# Altium PCB HSBNE-IO.PcbDoc (part 1 of 2)
Units mm, origin at the board's own origin, x right, y up, seen from the top; angles counter-clockwise.
Board outline 100.03 x 80.03 mm, 2 copper layers (Top Layer, Bottom Layer); 109 components, 155 nets, 584 pads, 281 vias.
Unrouted connection lines stored in the file: 2.
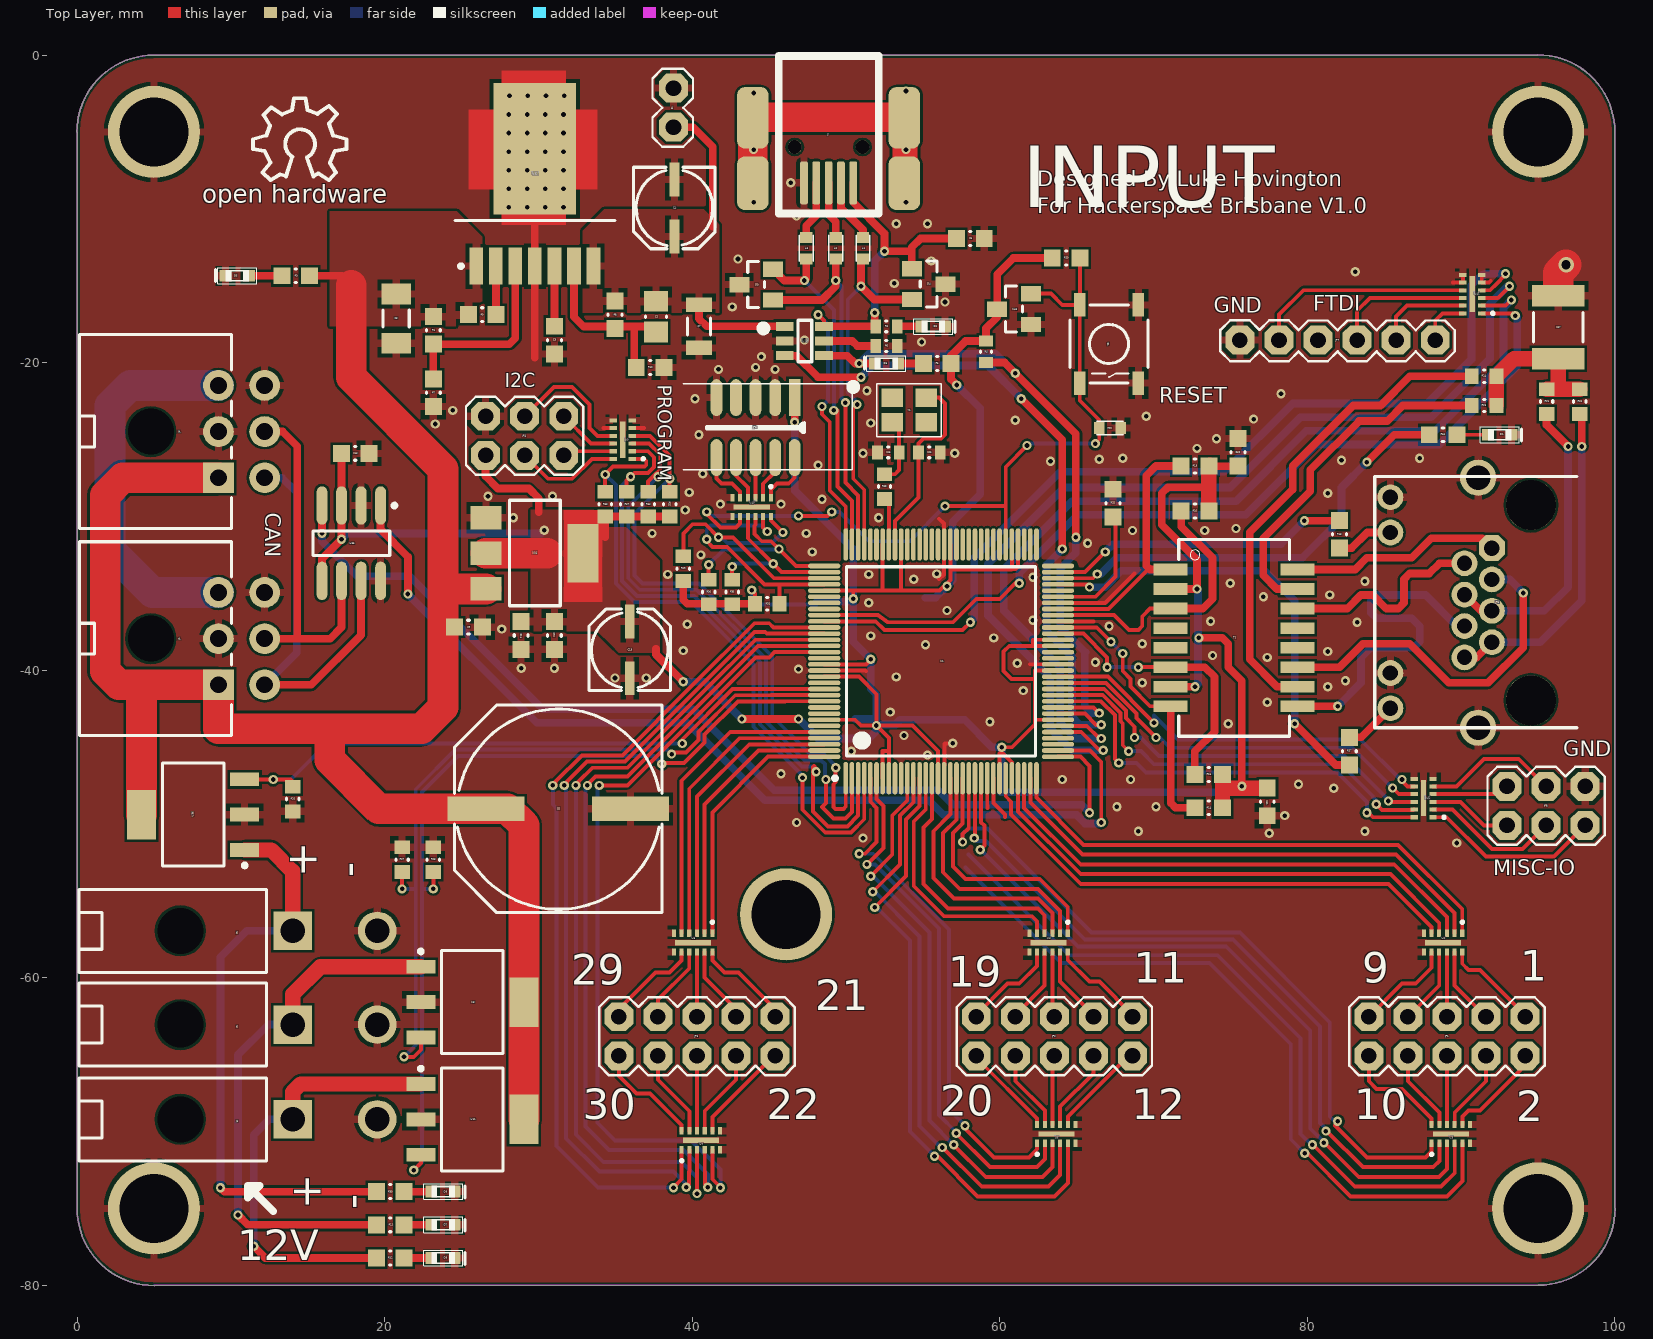
[diagram p0: Top Layer view]
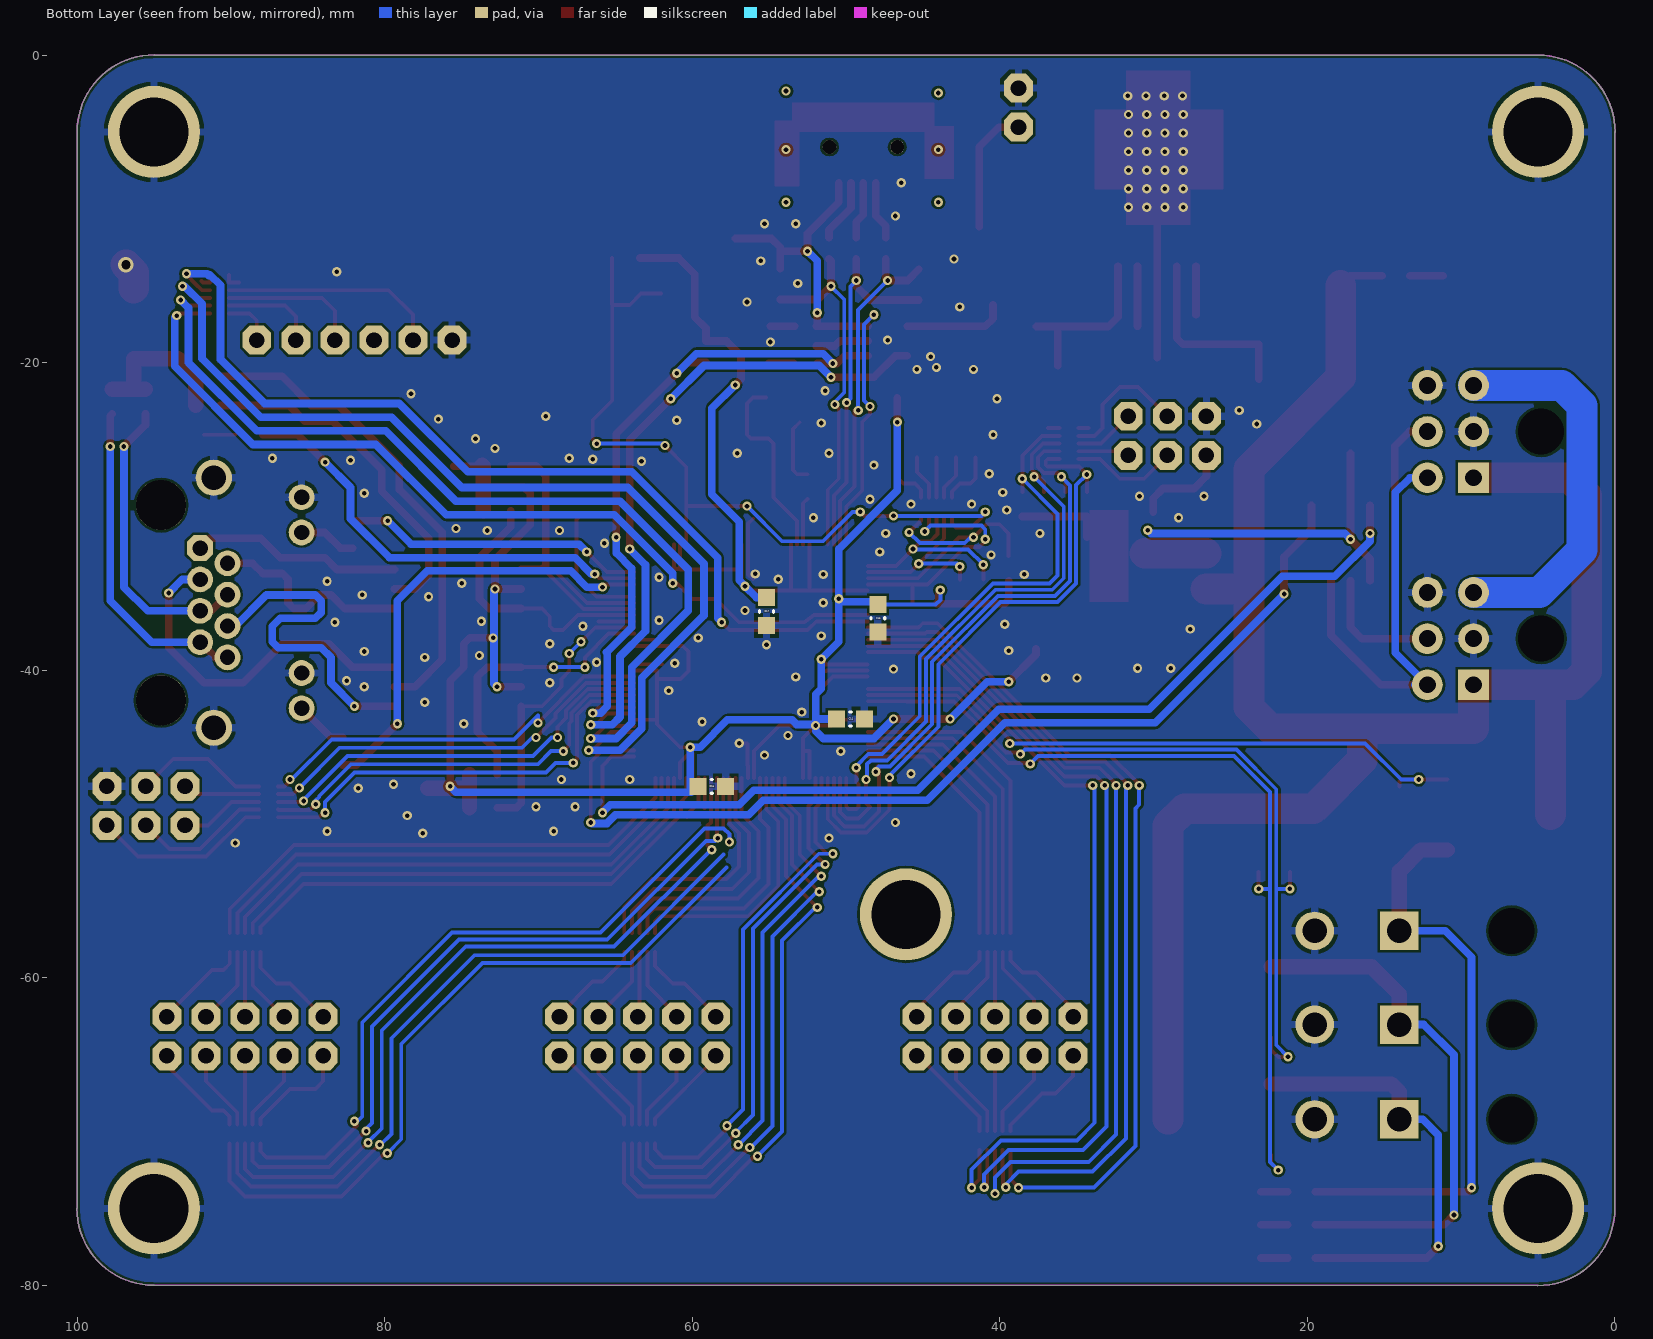
[diagram p1: Bottom Layer view, seen from below]

## Layer stack, top to bottom
Top Solder: solder mask 0.0102, Solder Resist, Dk 3.5
Top Layer: signal copper 0.0356
Dielectric 1: dielectric 0.32, FR-4, Dk 4.8
Bottom Layer: signal copper 0.0356
Bottom Solder: solder mask 0.0102, Solder Resist, Dk 3.5

## Board outline
5.004,-80.013 cw(c5.004,-75.013) 0.004,-75.013 0,-75 0,-5 -0.013,-5.004 cw(c4.987,-5.004) 4.987,-0.004 5,0 95,0 94.996,0.013 cw(c94.996,-4.987) 99.996,-4.987 100,-5 100,-75 100.013,-74.996 cw(c95.013,-74.996) 95.013,-79.996 95,-80

## Design rules (kind name [scope] priority, off if disabled: settings)
Clearance Micro [InComponent('U1') vs InNetClass('All Nets')] p1: gap=0.15 except(0.1: Track-Track Track-SMDPad Track-THPad SMDPad-SMDPad SMDPad-THPad THPad-THPad)
Clearance [All] p2: gap=0.15
DiffPairsRouting [All] p1: maxlimit=0.254 minlimit=0.254 mostfreqgap=0.254 toplayer_minwidth=0.254 toplayer_maxwidth=0.5 toplayer_prefwidth=0.381 bottomlayer_minwidth=0.254 bottomlayer_maxwidth=0.5 bottomlayer_prefwidth=0.381 maxuncoupledlength=12.7
HoleSize [All] p1: absolutevalues=TRUE maxlimit=4.5 minlimit=0.025 maxpercent=80.000 minpercent=20.000
MinimumSolderMaskSliver [All] p1: minsoldermaskwidth=0.2
PlaneClearance [All] p1: clearance=2
PlaneConnect [All] p1: planeconnectstyle=Relief reliefexpansion=0.508 reliefentries=4 reliefconductorwidth=0.5 reliefairgap=0.254
PolygonConnect via [All vs isvia] p1: connectstyle=Direct reliefconductorwidth=0.254 reliefentries=4 polygonreliefangle="90 Angle" airgapwidth=0.254
PolygonConnect [All] p2: connectstyle=Relief reliefconductorwidth=0.5 reliefentries=4 polygonreliefangle="90 Angle" airgapwidth=0.254
RoutingVias [All] p1: holewidth=0.5 width=1 viastyle="Through Hole" minholewidth=0.3 minwidth=0.6 maxholewidth=0.711 maxwidth=1.27
SilkToSolderMaskClearance [IsPad] p1: minsilkscreentomaskgap=0.127 clearancetoexposedcopper=TRUE
SolderMaskExpansion [All] p1: expansion=0.102
Width [All] p1: maxlimit=2 minlimit=0.254 preferedwidth=0.254
24 further rules are at their usual default settings.

## Classes and differential pairs
component class Power: C1 C3 C4 C6 C7 C8 C9 C10 C11 C13 C14 C15 C16 C17 D5 D7 D8 D9 J3 J4 J5 J6 R1 R3 R7 R8 R9 R10 R11 R12 R26 R27 R28 R30 U8 U11 U32 U34 U36
component class ButtonInputs: JP1 JP2 JP3 U2 U3 U4 U5 U6 U7
component class Micro: U1
component class Crystal: C20 C21 C24 C25 C26 C27 D1 JP5 R13 R14 R15 R16 R17 R18 R19 R20 R21 R22 R23 R24 R25 R34 S1 T1 U43 Y1
component class IO: C5 C12 D2 D3 D4 D6 J1 J2 J7 JP4 JP6 JP7 JP8 L1 L2 L3 R2 R4 R5 R6 R29 R31 R32 R33 R35 R36 R37 R38 U9 U10 U35 U40 U41 U42
differential pair RX: +RX_P -RX_N
differential pair EP_RX: +EP_RX_P -EP_RX_N
differential pair EP_TX: +EP_TX_P -EP_TX_N
differential pair TX: +TX_P -TX_N
differential pair USB: +USB_P -USB_N

## Components (designator, comment, footprint, x,y, rotation, side; value= is the part's Value field where it differs from the comment)
C1 "CAP 22nF 25V" CAPC0805(2012)100_M 37.643,-17.008 r90 top
C3 "CAP 4.7nF 50V" CAPC0603(1608)100_M 31.039,-18.532 r90 top
C4 "100uF" PANASONIC_C 39.04,-9.896 r270 top
C5 "CAP 100nF 50V" CAPC0603(1608)100_M 58.09,-11.928 r180 top
C6 "1000uF" PANASONIC_H13 31.293,-49.012 r180 top
C7 "CAP 47uF 25V" CAPC1206(3216)100_L 40.437,-17.643 r270 top
C8 "CAP 10uF 50V" CAPC1206(3216)190_M 20.752,-17.135 r270 top
C9 "CAP 1uF 25V" CAPC0603(1608)100_M 25.451,-37.201 r180 top
C10 "CAP 1uF 25V" CAPC0603(1608)100_M 31.035,-37.74 r90 top
C11 "CAP 1uF 25V" CAPC0603(1608)100_M 28.876,-37.74 r90 top
C12 "CAP 100nF 50V" CAPC0603(1608)100_M 18.085,-25.898 r180 top
C13 "100uF" PANASONIC_C 35.738,-38.725 r90 top
C14 "CAP 100nF 50V" CAPC0603(1608)100_M 49.708,-43.17 r0 bottom
C15 "CAP 100nF 50V" CAPC0603(1608)100_M 58.725,-47.549 r0 bottom
C16 "CAP 100nF 50V" CAPC0603(1608)100_M 47.93,-36.627 r90 bottom
C17 "CAP 100nF 50V" CAPC0603(1608)100_M 55.169,-36.185 r90 bottom
C20 "CAP 100nF 50V" CAPC0603(1608)100_M 75.489,-25.832 r270 top
C21 "CAP 100nF 50V" CAPC0603(1608)100_M 77.394,-48.565 r90 top
C24 "NP" 0603 67.869,-24.247 r180 top
C25 "CAP 12pF 16V" CAPC0603(1608)100_L 52.756,-25.832 r0 top
C26 "CAP 12pF 16V" CAPC0603(1608)100_L 55.423,-25.832 r180 top
C27 "CAP 1nF 2KV 1812(4532)" CAPC1812(4532)230_N 96.317,-17.704 r90 top
D1 "LED" LED-0603 92.507,-24.689 r0 top
D2 "LED" LED-0603 55.677,-17.643 r0 top
D3 "GSOT12C" "SOT-23 - ESD" 45.263,-15.926 r90 top
D4 "GSOT12C" "SOT-23 - ESD" 54.28,-13.894 r270 top
D5 "LED" LED-0603 10.414,-14.351 r180 top
D6 "LED" LED-0603 52.629,-20.056 r180 top
D7 "LED" LED-0603 23.8,-76.063 r0 top
D8 "LED" LED-0603 23.8,-78.222 r0 top
D9 "LED" LED-0603 23.8,-73.904 r0 top
J1 "M43045H-6" M43045H-6 9.195,-40.945 r270 top
J2 "M43045H-6" M43045H-6 9.195,-27.483 r270 top
J3 "AUX" M5569-2 14.021,-69.205 r270 top
J4 "1x2" 1X2 38.786,-4.689 r90 top
J5 "AUX" M5569-2 14.021,-56.947 r270 top
J6 "AUX" M5569-2 14.021,-63.043 r270 top
J7 "67503-1020" MOLX-67503-1020_V 50.47,-8.306 r270 top
JP1 "Header 5x2 2.54mm" 2X5 89.078,-63.805 r180 top
JP2 "Header 5x2 2.54mm" 2X5 63.551,-63.805 r180 top
JP3 "Header 5x2 2.54mm" 2X5 40.31,-63.805 r180 top
JP4 "Header 3x2 2.54mm" 2X3 29.134,-24.755 r0 top
JP5 "RJHSE-5384" RJHSE-5484 94.54,-35.613 r90 top
JP6 "Header 5x2 1.27mm" SOP10 46.66,-22.276 r270 top
JP7 "FTDI Header" 1X6 84.506,-19.802 r180 top
JP8 "Header 3x2 2.54mm" 2X3 95.555,-48.819 r0 top
L1 "MPZ1608S102A" 0603 51.105,-13.259 r90 top
L2 "MPZ1608S102A" 0603 49.327,-13.259 r90 top
L3 "MPZ1608S102A" 0603 47.422,-13.259 r90 top
R1 "34K 1%" RESC0603(1608)_M 23.165,-17.897 r90 top
R2 "180R 5%" RESC0603(1608)_L 52.629,-17.643 r180 top
R3 "560R 5%" RESC0603(1608)_M 14.224,-14.351 r0 top
R4 "16K 5%" RESC0603(1608)_L 59.106,-19.294 r90 top
R5 "68R 5%" RESC0603(1608)_M 55.931,-20.056 r0 top
R6 "16K 5%" RESC0603(1608)_L 52.629,-18.913 r180 top
R7 "2K43 5%" RESC0603(1608)_M 23.165,-21.961 r90 top
R8 "34K 1%" RESC0603(1608)_M 34.976,-16.881 r90 top
R9 "249K 1%" RESC0603(1608)_M 26.34,-16.881 r0 top
R10 "2K43 5%" RESC0603(1608)_M 37.262,-20.31 r180 top
R11 "560R 5%" RESC0603(1608)_M 20.371,-76.063 r180 top
R12 "560R 5%" RESC0603(1608)_M 20.371,-78.222 r180 top
R13 "49.9R 5%" RESC0603(1608)_M 72.695,-26.721 r0 top
R14 "49.9R 5%" RESC0603(1608)_M 73.584,-48.946 r0 top
R15 "49.9R 5%" RESC0603(1608)_M 73.584,-46.787 r0 top
R16 "49.9R 5%" RESC0603(1608)_M 72.695,-29.642 r0 top
R17 "220R 5%" RESC0603(1608)_M 82.728,-45.263 r270 top
R18 "220R 5%" RESC0603(1608)_M 82.093,-31.166 r90 top
R19 "2K43 5%" RESC0603(1608)_M 64.313,-13.198 r180 top
R20 "2K 5%" RESC0603(1608)_N 52.502,-28.057 r90 top
R21 "75R 5%" RESC0603(1608)_N 95.555,-22.53 r90 top
R22 "75R 5%" RESC0603(1608)_N 97.714,-22.53 r90 top
R23 "75R 5%" RESC0603(1608)_N 91.491,-22.784 r0 top
R24 "75R 5%" RESC0603(1608)_N 91.491,-20.879 r0 top
R25 "4K87 5%" RESC0603(1608)_M 67.361,-29.134 r270 top
R26 "10K 5%" RESC0603(1608)_N 14.021,-48.377 r90 top
R27 "10K 5%" RESC0603(1608)_N 21.133,-52.314 r270 top
R28 "10K 5%" RESC0603(1608)_N 23.165,-52.314 r270 top
R29 "10K 5%" RESC0603(1608)_N 39.421,-33.391 r270 top
R30 "560R 5%" RESC0603(1608)_M 20.371,-73.904 r180 top
R31 "10K 5%" RESC0603(1608)_N 44.882,-35.677 r180 top
R32 "10K 5%" RESC0603(1608)_N 38.532,-29.2 r270 top
R33 "10K 5%" RESC0603(1608)_N 37.135,-29.2 r270 top
R34 "220R 5%" RESC0603(1608)_M 88.824,-24.689 r180 top
R35 "10K 5%" RESC0603(1608)_N 42.596,-34.915 r90 top
R36 "10K 5%" RESC0603(1608)_N 41.072,-34.915 r90 top
R37 "10K 5%" RESC0603(1608)_N 35.738,-29.2 r270 top
R38 "10K 5%" RESC0603(1608)_N 34.341,-29.2 r270 top
S1 "EVQ-Q2B03W" TACTILE_SWITCH_SMD 67.107,-18.786 r270 top
T1 "H2019FNLT" HXXXX 75.235,-37.897 r270 top
U1 "TM4C1294NCPDTI3R" TI-PDT128_M 56.185,-39.421 r90 top
U2 "NUF6401MNT1G" ONSC-DFN-12-506AD-01_V#1 88.824,-57.709 r270 top
U3 "NUF6401MNT1G" ONSC-DFN-12-506AD-01_V#1 89.332,-70.155 r90 top
U4 "NUF6401MNT1G" ONSC-DFN-12-506AD-01_V#1 63.17,-57.709 r270 top
U5 "NUF6401MNT1G" ONSC-DFN-12-506AD-01_V#1 63.678,-70.155 r90 top
U6 "NUF6401MNT1G" ONSC-DFN-12-506AD-01_V#1 40.056,-57.709 r270 top
U7 "NUF6401MNT1G" ONSC-DFN-12-506AD-01_V#1 40.564,-70.569 r90 top
U8 "ITS4200S-ME-O" INF-SOT223_M 25.705,-61.585 r0 top
U9 "NUF6401MNT1G" ONSC-DFN-12-506AD-01_V#2 35.484,-25.009 r180 top
U10 "BD2242G" SOT23-6 46.025,-17.643 r270 top
U11 "ITS4200S-ME-O" INF-SOT223_M 25.705,-69.205 r0 top
U32 "LMZ14203HTZ/NOPB" TZA07A_V 29.769,-8.372 r90 top
U34 "3V3LinReg" SOT-223 26.594,-30.089 r270 top
U35 "SN65HVD234D" D8_M 17.831,-31.74 r270 top
U36 "ITS4200S-ME-O" INF-SOT223_M 7.544,-49.393 r180 top
U40 "NUF6401MNT1G" ONSC-DFN-12-506AD-01_V#1 43.866,-29.388 r270 top
U41 "NUF6401MNT1G" ONSC-DFN-12-506AD-01_V#1 90.729,-15.545 r180 top
U42 "NUF6401MNT1G" ONSC-DFN-12-506AD-01_V#1 87.554,-48.311 r180 top
U43 "APX803" "SOT-23 - ESD" 62.027,-17.516 r90 top
Y1 "25MHz" "CRYSTAL 3.2X2.5" 51.994,-24.816 r0 top

## Footprints (in the part's own frame and the unit in brackets; to place one, negate y for a bottom-side part, rotate by r counter-clockwise, add the part's x,y. Pads: shape width x height; smd on the part's side, far side on the other; paste and mask are expansions set on the pad)
1X2 [mil]
  oct 74x74 hole 40: 1(0,0) 2(100,0)
  silkscreen extent -50,-50 150,54
1X6 [mil]
  oct 74x74 hole 40: 1(-150,-50) 2(-50,-50) 3(50,-50) 4(150,-50) 5(250,-50) 6(350,-50)
  silkscreen extent -200,-101 400,4, body extent -200,-100 400,0, height 298
2X3 [mil]
  oct 74x74 hole 40: 1(-101.18,-50) 2(-101.18,50) 3(-1.18,-50) 4(-1.18,50) 5(98.82,-50) 6(98.82,50)
  silkscreen extent -151,-100 149,100, body extent -150,-100 150,100, height 330
2X5 [mil]
  oct 74x74 hole 40: 1(-200,-50) 2(-200,50) 3(-100,-50) 4(-100,50) 5(0,-50) 6(0,50) 7(100,-50) 8(100,50) 9(200,-50) 10(200,50)
  silkscreen extent -250,-100 250,100, body extent -242,-95 242,95, height 397
0603 [mm]
  rect 0.7x0.8 smd paste+0 mask+0.1: 1(0,0) 2(1.4,0)
  silkscreen extent -0.15,-0.45 1.55,0.45, body extent -0.15,-0.45 1.55,0.45, height 0.53
CAPC0603(1608)100_L [mm] "Chip Capacitor, Body 1.6x0.8mm, Height 1.0mm, IPC High Density"
  rect 0.7x0.9 smd: 1(-0.7,0) 2(0.7,0)
  silkscreen extent -0.05,-0.35 0.05,0.35, body extent -0.87,-0.47 0.88,0.48, height 1
CAPC0603(1608)100_M [mm] "Chip Capacitor, Body 1.6x0.8mm, Height 1.0mm, IPC Low Density"
  rect 1.1x1.1 smd: 1(-0.9,0) 2(0.9,0)
  silkscreen extent -0.05,-0.45 0.05,0.45, body extent -0.87,-0.47 0.88,0.48, height 1
CAPC0805(2012)100_M [mm] "Chip Capacitor, Body 2.0x1.2mm, Height 1.0mm, IPC Low Density"
  rect 1.35x1.55 smd: 1(-1,0) 2(1,0)
  silkscreen extent -0.05,-0.67 0.05,0.67, body extent -1.1,-0.72 1.1,0.72, height 1
CAPC1206(3216)100_L [mm] "Chip Capacitor, Body 3.2x1.6mm, Height 1mm, IPC High Density"
  rect 0.95x1.7 smd: 1(-1.4,0) 2(1.4,0)
  silkscreen extent -0.55,-0.75 0.55,0.75, body extent -1.7,-0.9 1.7,0.9, height 1
CAPC1206(3216)190_M [mm] "Chip Capacitor, Body 3.2x1.6mm, Height 1.9mm, IPC Low Density"
  rect 1.35x1.9 smd: 1(-1.6,0) 2(1.6,0)
  silkscreen extent -0.55,-0.85 0.55,0.85, body extent -1.7,-0.9 1.7,0.9, height 1.9
CAPC1812(4532)230_N [mm] "Chip Capacitor, Body 4.5x3.2mm, Height 2.3mm, IPC Medium Density"
  rect 1.4x3.4 smd: 1(-2.05,0) 2(2.05,0)
  silkscreen extent -0.95,-1.6 0.95,1.6, body extent -2.4,-1.7 2.4,1.7, height 2.3
"CRYSTAL 3.2X2.5" [mm]
  rect 1.4x1.2 smd: 1(1.016,0.94) 2(3.216,0.94) 3(3.216,2.54) 4(1.016,2.54)
  silkscreen extent 0,0 4.19,3.43, body extent 0.77,0.78 3.29,2.78, height 0.56
D8_M [mm] "SOIC, 8-Leads, Body 4.9x3.9mm, Pitch 1.27mm, IPC Low Density"
  oval 2.5x0.7 smd: 1(-2.45,1.905) 2(-2.45,0.635) 3(-2.45,-0.635) 4(-2.45,-1.905) 5(2.45,-1.905) 6(2.45,-0.635) 7(2.45,0.635) 8(2.45,1.905)
  silkscreen extent -2.57,-2.5 0.8,2.93, body extent -2,-2.5 2,2.5, height 1.75
HXXXX [mm]
  rect 0.76x2.2 smd: 1(-4.445,-4.128) 2(-3.175,-4.128) 3(-1.905,-4.128) 4(-0.635,-4.128) 5(0.635,-4.128) 6(1.905,-4.128) 7(3.175,-4.128) 8(4.445,-4.128) 9(4.445,4.128) 10(3.175,4.128) 11(1.905,4.127) 12(0.635,4.127) 13(-0.635,4.127) 14(-1.905,4.127) 15(-3.175,4.127) 16(-4.445,4.127)
  silkscreen extent -6.4,-3.6 6.4,3.6, body extent -6.38,-4.28 6.38,4.13, height 6
INF-SOT223_M [mm] "SOT223, 4-Leads, Body 6.5x3.5mm, Pitch 2.3mm, IPC Low Density"
  rect 1.9x0.9 smd: 1(-3.35,2.3) 2(-3.35,0) 3(-3.35,-2.3)
  rect 1.9x3.2 smd: 4(3.35,0)
  silkscreen extent -3.47,-3.35 2,3.42, body extent -1.85,-3.35 1.85,3.35, height 1.7
LED-0603 [mil]
  rect 30x30 smd: 1(-30,0) 2(30,0)
  Top Overlay keep-out lines w2: -50,-20 50,-20 50,20 -50,20 -50,-20
  silkscreen extent -50,-20 56,20, body extent -33,-14 32,14, height 27
M5569-2 [mm]
  rect 2.5x2.5 hole 1.6: 1(0,0)
  round 2.5 hole 1.6: 2(0,5.5)
  round 0 hole 3 unplated: A(0,-7.3)
  silkscreen extent -2.7,-13.9 2.7,-1.7, body extent -2.72,-13.91 3.08,6.03, height 11.4
M43045H-6 [mm]
  rect 2x2 hole 1.1: 1(0,0)
  round 2 hole 1.1: 2(-3,0) 3(-6,0) 4(0,3) 5(-3,3) 6(-6,3)
  round 0 hole 3 unplated: 7(-3,-4.4)
  silkscreen extent -9.3,-9.05 3.3,0.85, body extent -9.57,-8.95 3.58,3.25, height 8.83
MOLX-67503-1020_V [mm] "Mini USB Connector, SMT, Righer Angle"
  rrect50% 2.8x0.5 smd: 1(0,0) 2(0,-0.8) 3(0,-1.6) 4(0,-2.4) 5(0,-3.2)
  rrect50% 3.5x2.05 smd: 6(0.025,3.325) 8(0.025,-6.525)
  rrect50% 4x2.05 smd: 7(-4.225,3.325) 9(-4.225,-6.525)
  round 0.9 hole 0.9 unplated: X(-2.325,-3.8) Y(-2.325,0.6)
  silkscreen extent -8.25,-4.85 2,1.65, body extent -8.22,-6.56 0.78,3.34, height 3.95
ONSC-DFN-12-506AD-01_V#1 [mm] "SON, 12-Leads, Body 3x1.35mm, Pitch 0.5mm, Thermal Pad 2.352x0.351mm"
  rect 0.479x0.265 smd mask+0.05: 1(-0.614,1.25) 2(-0.614,0.75) 3(-0.614,0.25) 4(-0.614,-0.25) 5(-0.614,-0.75) 6(-0.614,-1.25) 7(0.614,-1.25) 8(0.614,-0.75) 9(0.614,-0.25) 10(0.614,0.25) 11(0.614,0.75) 12(0.614,1.25)
  rect 0.351x2.352 smd mask+0.05: 13(0,0)
  silkscreen extent -1.38,1.2 -1.28,1.3, body extent -0.67,-1.5 0.67,1.5, height 1
ONSC-DFN-12-506AD-01_V#2 [mm] "SON, 12-Leads, Body 3x1.35mm, Pitch 0.5mm, Thermal Pad 2.352x0.351mm"
  rect 0.479x0.265 smd: 1(-0.614,1.25) 2(-0.614,0.75) 3(-0.614,0.25) 4(-0.614,-0.25) 5(-0.614,-0.75) 6(-0.614,-1.25) 7(0.614,-1.25) 8(0.614,-0.75) 9(0.614,-0.25) 10(0.614,0.25) 11(0.614,0.75) 12(0.614,1.25)
  rect 0.351x2.352 smd: 13(0,0)
  silkscreen extent -1.38,1.2 -1.28,1.3, body extent -0.67,-1.5 0.67,1.5, height 1
PANASONIC_C [mm]
  rect 2.2x0.65 smd: +(1.9,-0.2) -(-1.8,-0.2)
  silkscreen extent -2.6,-2.85 2.7,2.45, body extent -2.63,-2.88 2.75,2.5, height 5.4
PANASONIC_H13 [mm]
  rect 5x1.6 smd: +(4.7,0) -(-4.7,0)
  silkscreen extent -6.75,-6.75 6.75,6.75, body extent -6.75,-6.75 6.75,6.75, height 13.5
RESC0603(1608)_L [mm] "Chip Resistor, Body 1.6x0.8mm, IPC High Density"
  rect 0.7x0.9 smd: 1(-0.7,0) 2(0.7,0)
  silkscreen extent -0.05,-0.35 0.05,0.35, body extent -0.85,-0.47 0.85,0.47, height 0.6
RESC0603(1608)_M [mm] "Chip Resistor, Body 1.6x0.8mm, IPC Low Density"
  rect 1.1x1.1 smd: 1(-0.9,0) 2(0.9,0)
  silkscreen extent -0.05,-0.45 0.05,0.45, body extent -0.85,-0.47 0.85,0.47, height 0.6
RESC0603(1608)_N [mm] "Chip Resistor, Body 1.6x0.8mm, IPC Medium Density"
  rect 0.9x1 smd: 1(-0.8,0) 2(0.8,0)
  silkscreen extent -0.05,-0.4 0.05,0.4, body extent -0.85,-0.47 0.85,0.47, height 0.6
RJHSE-5484 [mm]
  oct 1.676x1.676 hole 1: 1(3.555,2.54)
  round 1.676 hole 1: 2(2.565,4.32) 3(1.515,2.54) 4(0.525,4.32) 5(-0.525,2.54) 6(-1.515,4.32) 7(-2.565,2.54) 8(-3.555,4.32) 9(-6.86,9.14) 10(-4.57,9.14) 11(4.57,9.14) 12(6.86,9.14)
  round 2.355 hole 1.57: GND1(-8.13,3.43) GND2(8.13,3.43)
  round 3.25 hole 3.25 unplated: ""(-6.35,0) ""(6.35,0)
  silkscreen extent -8.13,-3 8.2,10.16, body extent -8.35,-5.96 8.36,10.29, height 14.75
SOP10 [mm]
  rect 2.4x0.76 smd: 1(0,0)
  oval 2.4x0.76 smd: 2(3.9,0) 3(0,-1.27) 4(3.9,-1.27) 5(0,-2.54) 6(3.9,-2.54) 7(0,-3.81) 8(3.9,-3.81) 9(0,-5.08) 10(3.9,-5.08)
  silkscreen extent -0.89,-7.24 4.7,3.76, body extent -1.14,-7.24 4.83,2.29, height 5.59
SOT23-6 [mm]
  rect 0.6x1.15 smd: 1(0,0) 2(0.95,0) 3(1.9,0) 4(1.9,2.55) 5(0.95,2.54) 6(0,2.55)
  silkscreen extent -0.4,0.85 2.3,1.75, body extent -0.51,0.63 2.41,2.03, height 0.5
"SOT-23 - ESD" [mm]
  rect 1x1.3 smd: 1(0,0) 2(2,0) 3(1,2.2)
  silkscreen extent -0.5,0.55 2.5,1.65, body extent -0.64,0.51 2.54,1.78, height 1
SOT-223 [mil]
  rect 60x80 smd: 1(0,0) 2(91,0) 3(182,0)
  rect 150x80 smd: 4(91,248)
  silkscreen extent -45,60 225,190, body extent -38,-7 218,267, height 63
TACTILE_SWITCH_SMD [mil]
  rect 60x30 smd: 1(-100,75) 2(100,75) 3(-100,-75) 4(100,-75)
  silkscreen extent -100,-100 100,100, body extent -103,-108 103,103, height 122
TI-PDT128_M [mm] "Thin QFP, 128-Leads, Body 14x14mm, Pitch 0.4mm, IPC Low Density"
  oval 2.1x0.3 smd: 1(-7.6,6.2) 2(-7.6,5.8) 3(-7.6,5.4) 4(-7.6,5) 5(-7.6,4.6) 6(-7.6,4.2) 7(-7.6,3.8) 8(-7.6,3.4) 9(-7.6,3) 10(-7.6,2.6) 11(-7.6,2.2) 12(-7.6,1.8) 13(-7.6,1.4) 14(-7.6,1) 15(-7.6,0.6) 16(-7.6,0.2) 17(-7.6,-0.2) 18(-7.6,-0.6) 19(-7.6,-1) 20(-7.6,-1.4) 21(-7.6,-1.8) 22(-7.6,-2.2) 23(-7.6,-2.6) 24(-7.6,-3) 25(-7.6,-3.4) 26(-7.6,-3.8) 27(-7.6,-4.2) 28(-7.6,-4.6) 29(-7.6,-5) 30(-7.6,-5.4) 31(-7.6,-5.8) 32(-7.6,-6.2) 65(7.6,-6.2) 66(7.6,-5.8) 67(7.6,-5.4) 68(7.6,-5) 69(7.6,-4.6) 70(7.6,-4.2) 71(7.6,-3.8) 72(7.6,-3.4) 73(7.6,-3) 74(7.6,-2.6) 75(7.6,-2.2) 76(7.6,-1.8) 77(7.6,-1.4) 78(7.6,-1) 79(7.6,-0.6) 80(7.6,-0.2) 81(7.6,0.2) 82(7.6,0.6) 83(7.6,1) 84(7.6,1.4) 85(7.6,1.8) 86(7.6,2.2) 87(7.6,2.6) 88(7.6,3) 89(7.6,3.4) 90(7.6,3.8) 91(7.6,4.2) 92(7.6,4.6) 93(7.6,5) 94(7.6,5.4) 95(7.6,5.8) 96(7.6,6.2)
  oval 0.3x2.1 smd: 33(-6.2,-7.6) 34(-5.8,-7.6) 35(-5.4,-7.6) 36(-5,-7.6) 37(-4.6,-7.6) 38(-4.2,-7.6) 39(-3.8,-7.6) 40(-3.4,-7.6) 41(-3,-7.6) 42(-2.6,-7.6) 43(-2.2,-7.6) 44(-1.8,-7.6) 45(-1.4,-7.6) 46(-1,-7.6) 47(-0.6,-7.6) 48(-0.2,-7.6) 49(0.2,-7.6) 50(0.6,-7.6) 51(1,-7.6) 52(1.4,-7.6) 53(1.8,-7.6) 54(2.2,-7.6) 55(2.6,-7.6) 56(3,-7.6) 57(3.4,-7.6) 58(3.8,-7.6) 59(4.2,-7.6) 60(4.6,-7.6) 61(5,-7.6) 62(5.4,-7.6) 63(5.8,-7.6) 64(6.2,-7.6) 97(6.2,7.6) 98(5.8,7.6) 99(5.4,7.6) 100(5,7.6) 101(4.6,7.6) 102(4.2,7.6) 103(3.8,7.6) 104(3.4,7.6) 105(3,7.6) 106(2.6,7.6) 107(2.2,7.6) 108(1.8,7.6) 109(1.4,7.6) 110(1,7.6) 111(0.6,7.6) 112(0.2,7.6) 113(-0.2,7.6) 114(-0.6,7.6) 115(-1,7.6) 116(-1.4,7.6) 117(-1.8,7.6) 118(-2.2,7.6) 119(-2.6,7.6) 120(-3,7.6) 121(-3.4,7.6) 122(-3.8,7.6) 123(-4.2,7.6) 124(-4.6,7.6) 125(-5,7.6) 126(-5.4,7.6) 127(-5.8,7.6) 128(-6.2,7.6)
  silkscreen extent -7.72,-6.15 6.15,7.02, body extent -7,-7 7,7, height 1.2
TZA07A_V [mm] "D2-PAK, 8-Leads, Body 9.9x10.2mm, Pitch 1.27mm, Lead Span 13.8mm, NSC Recommended"
  rect 2.41x0.89 smd: 1(-5.35,3.81) 2(-5.35,2.54) 3(-5.35,1.27) 4(-5.35,0) 5(-5.35,-1.27) 6(-5.35,-2.54) 7(-5.35,-3.81)
  rect 8.54x5.35 smd: 8(2.28,0)
  silkscreen extent -5.47,-5.2 -2.39,5.2, body extent -2.3,-5.2 7.8,5.2, height 4.67

## Part data
C1: library part CMP-1036-04051-1, "CAP 22nF 25V ±5% 0805 (2012 Metric) Thickness 1mm SMD"
C3: library part CMP-1035-00333-1, "CAP 4.7nF 50V ±20% 0603 (1608 Metric) Thickness 1mm SMD"
C4 C13: library part Cap_Polarized_100uF, "Polarized Capacitor (Surface Mount)"
C5 C12 C14 C15 C16 C17 C20 C21: library part CMP-1035-00010-1, "CAP 100nF 50V ±0.1pF 0603 (1608 Metric) Thickness 1mm SMD"
C6: library part Cap_Polarized_1000uF, "Polarized Capacitor (Surface Mount)"
C7: library part CMP-1037-00376-1, "CAP 47uF 25V ±0.25pF 1206 (3216 Metric) Thickness 1mm SMD"
C8: library part CMP-1037-04982-1, "CAP 10uF 50V ±10% 1206 (3216 Metric) Thickness 1.9mm SMD"
C9 C10 C11: library part CMP-1035-00037-1, "CAP 1uF 25V ±0.25pF 0603 (1608 Metric) Thickness 1mm SMD"
C24: library part Cap_100pF, "Capacitor (Semiconductor SIM Model)"
C25 C26: library part CMP-1035-00602-1, "CAP 12pF 16V ±0.25pF 0603 (1608 Metric) Thickness 1mm SMD"
C27: library part CMP-1040-00330-1, "CAP 1nF 2KV ±10% 1812 (4532 Metric) Thickness 2.3mm SMD"
D1 D2 D5 D6 D7 D8 D9: "Typical RED, GREEN, YELLOW, AMBER GaAs LED"
D3 D4: library part 2749, "DIO GSOT12C ESD 2LINE 12V SOT23"
J1 J2: library part CON6
J3 J4 J5 J6: library part CON2, "6.35mm right-angle 90° male spade terminal PCB mount"
J7: library part CMP-0411-00002-1, "USB, MINI, SMD, RA KME04-USBMU03A01"
JP1 JP2 JP3: library part "Header 5x2", "Header, 8-Pin"
JP4 JP8: library part "Header 3x2", "Header, 6-Pin"
JP5: library part "Ethernet Socket", "Ethernet Socket RJ45 With Leds"
JP6: library part "Header 5x2", "Program"
JP7: library part "Header 6", "Header, 6-Pin"
L1 L2 L3: library part 2982, "IND FERRITE CHIP BEAD 1000 OHM @ 100MHz 800mA 0603"
R1 R8: library part CMP-1012-00682-1, "34K 0.1W 1% 0603 (1608 Metric)  SMD"
R2: library part CMP-1012-00056-1, "180R 0.1W 5% 0603 (1608 Metric)  SMD"
R3 R11 R12 R30: library part CMP-1012-00068-1, "560R 0.1W 5% 0603 (1608 Metric)  SMD"
R4 R6: library part CMP-1012-00103-1, "16K 0.1W 5% 0603 (1608 Metric)  SMD"
R5: library part CMP-1012-00046-1, "68R 0.1W 5% 0603 (1608 Metric)  SMD"
R7 R10 R19: library part CMP-1012-00083-1, "2K43 0.1W 5% 0603 (1608 Metric)  SMD"
R9: library part CMP-1012-00779-1, "249K 0.1W 1% 0603 (1608 Metric)  SMD"
R13 R14 R15 R16: library part CMP-1012-00042-1, "49.9R 0.1W 5% 0603 (1608 Metric)  SMD"
R17 R18 R34: library part CMP-1012-00058-1, "220R 0.1W 5% 0603 (1608 Metric)  SMD"
R20: library part CMP-1012-00081-1, "2K 0.1W 5% 0603 (1608 Metric)  SMD"
R21 R22 R23 R24: library part CMP-1012-00047-1, "75R 0.1W 5% 0603 (1608 Metric)  SMD"
R25: library part CMP-1012-00090-1, "4K87 0.1W 5% 0603 (1608 Metric)  SMD"
R26 R27 R28 R29 R31 R32 R33 R35 R36 R37 R38: library part CMP-1012-00098-1, "10K 0.1W 5% 0603 (1608 Metric)  SMD"
S1: library part SW-PB, "Switch"
T1: library part Magnetics, "Power over Ethernet Magnetic Module"
U1: library part CMP-0945-00007-1, "Tiva C Series Microcontroller, 1024 KB Flash, 256 KB SRAM, 12 Bit, 20 Channels, -40 to 85 degC, 128-Pin TQFP (PDT), Green (RoHS & no Sb/Br), Tape and Reel"
U2 U3 U4 U5 U6 U7 U9 U40 U41 U42: library part CMP-1066-00005-1, "6-Channel EMI Filter with Integrated ESD Protection, -40 to 105 degC, 12-Pin DFN, Pb-Free, Tape and Reel"
U8 U11 U36: library part CMP-1095-00143-1, "Smart High-Side NMOS-Power Switch, 11 to 45 V Operating, -40 to 125 degC, SOT223, Reel, Green"
U10: library part RT9728A, "BD2242G-GTR"
U32: library part CMP-0069-02044-1, "3A SIMPLE SWITCHER® Power Module with 42V Maximum Input for High Voltage Output, 7-pin TO-PMOD, Pb-Free, 250 Reel"
U34: library part AZ1117EH, "Reg 1A 3V3 OUT SIP VERT"
U35: library part CMP-0315-00083-1, "3.3V CAN Transceiver with Sleep Mode, 6 mA, -40 to 125 degC, 8-pin SOIC (D), Green (RoHS & no Sb/Br)"
U43: "IC MPU RESET CIRC 3.08V SOT23R-3"
Y1: library part Crystal_25MHz, "Surface Mount Quartz Crystal"

## Free pads (board coordinates)
  round 6 hole 4.5: 0(5,-75) 1(95,-75) 2(95,-5) 3(5,-5)
  round 6 hole 4.5 unplated paste+0 mask+1: 5(46.101,-55.88)

## Via types
v1: diameter 0.6, hole 0.3, Top Layer to Bottom Layer, tented both sides, 252 vias
v2: diameter 0.6, hole 0.3, Top Layer to Bottom Layer, tented bottom, 28 vias
v3: diameter 1, hole 0.6, Top Layer to Bottom Layer, tented both sides, 1 vias

## Nets (pads, with @x,y where several pads share a name; then routed paths per layer and width w, separated by ;. In a path a pad name is that pad's centre, name@x,y a point inside that pad or via, vN(x,y) a via of type N, cw(c..) or ccw(c..) an arc to the next point about the centre after c; other vN are vias at no path point)
3V3: C10.2 C11.2 C12.2 C13.+ C14.2 C15.2 C16.2 C17.2 C20.2 C21.2 JP4.1 JP6.1 R4.2 R5.2 R13.2 R14.2 R15.2 R16.2 R19.2 R29.2 R31.2 R32.2 R33.2 R35.1 R36.1 R37.2 R38.2 T1.2 T1.7 U1.7 U1.8 U1.16 U1.26 U1.28 U1.39 U1.47 U1.51 U1.52 U1.68 U1.69 U1.79 U1.87 U1.90 U1.101 U1.113 U1.115 U1.122 U34.2 U34.4 U35.3 U35.5 U43.3 | length 267.6
  Top Layer w0.254: v1(43.866,-34.788) 44.082,-35.004 R31.2@44.082,-35.677 ; U1.122@48.585,-43.221 50.597,-43.221 50.969,-43.593 v1(51.975,-43.593) ; U1.115@48.585,-40.421 50.835,-40.421 51.975,-41.561 v1(51.975,-43.593) ; U1.113@48.585,-39.621 50.724,-39.621 ; U1.101@48.585,-34.821 50.47,-34.821 ; v1(50.47,-35.357) 50.47,-34.821 ; 50.724,-39.617 51.29,-39.617 v1(51.613,-39.294) ; U1.7@52.385,-47.021 52.385,-45.263 52.785,-45.263 ; 52.385,-34.811 U1.90@52.385,-31.821 ; U1.8@52.785,-47.021 52.785,-45.263 ; U1.87@53.585,-31.821 53.585,-34.761 53.645,-34.821 ; U1.16@55.985,-47.021 55.985,-45.263 54.315,-43.593 v1(51.975,-43.593) ; U1.79@56.785,-31.821 56.785,-33.452 ; U1.26@59.985,-47.021 59.985,-45.4 v1@60.122,-45.263 ; 60.757,-33.452 56.785,-33.452 ; U1.28@60.785,-47.021 60.785,-45.988 60.122,-45.325 v1@60.122,-45.263 ; U1.69@60.785,-31.821 60.785,-33.424 61.039,-33.424 61.185,-33.278 U1.68@61.185,-31.821 ; 62.281,-40.564 60.757,-40.564 60.249,-40.056 60.249,-38.786 60.614,-38.421 62.154,-38.421 ; U1.39@63.785,-43.221 62.281,-43.221 ; U1.47@63.785,-40.021 62.281,-40.021 62.281,-43.221 ; U1.51@63.785,-38.421 62.154,-38.421 ; U1.52@63.785,-38.021 62.154,-38.021 62.154,-38.421 ; 50.47,-34.821 53.645,-34.821 ; v1(51.975,-43.593) 52.785,-44.403 52.785,-45.263 ; 53.645,-34.821 56.086,-34.821 56.785,-34.122 56.785,-33.452 ; v1@60.122,-45.263 v1(60.122,-45.009) 60.785,-45.009 62.281,-43.513 62.281,-43.221
  Top Layer w0.5: U35.5@15.926,-34.19 15.926,-32.756 v1(17.196,-31.486) U35.3@17.196,-29.29 C12.2@17.196,-25.909 ; JP4.1@26.564,-26.025 26.564,-27.392 27.356,-28.184 29.388,-28.184 30.023,-28.819 30.023,-29.708 ; U34.4@32.893,-32.4 U34.4@33.579,-31.715 ; 34.341,-31.359 R38.2@34.341,-30 R37.2@35.738,-30 R33.2@37.135,-30 R32.2@38.532,-30 ; 37.643,-38.598 37.643,-38.979 v1(39.421,-40.757) ; R29.2@39.421,-34.191 39.421,-35.423 39.675,-35.677 R31.2@44.082,-35.677 ; v1(43.231,-43.17) v1(46.914,-43.17) ; v1(46.66,-23.866) JP6.1@46.66,-22.276 ; v1(57.201,-21.453) 56.831,-21.083 R5.2@56.831,-20.056 56.831,-19.537 57.774,-18.594 R4.2@59.106,-18.594 59.106,-17.77 59.827,-17.049 U43.3@59.827,-16.516 59.827,-14.255 60.884,-13.198 R19.2@63.413,-13.198 ; T1.7@71.107,-41.072 v1(72.695,-41.072) ; T1.2@71.107,-34.722 v1(72.822,-34.722) 72.822,-32.817 70.536,-30.531 70.536,-28.499 70.94,-28.095 73.595,-28.095 ; v1(72.949,-37.897) 74.473,-37.897 74.854,-38.278 74.854,-39.802 75.743,-40.691 v1(75.743,-47.549) ; R13.2@73.66,-26.67 73.722,-26.732 C20.2@75.489,-26.732
  Top Layer w1: R16.2@73.595,-29.642 73.595,-28.095 73.595,-26.735 R13.2@73.66,-26.67 ; R14.2@74.484,-48.946 74.484,-47.919 ; R15.2@74.484,-46.787 74.484,-47.919 ; C21.2@77.191,-47.676 74.727,-47.676 74.484,-47.919
  Top Layer w2: U34.2@26.594,-32.4 30.556,-32.4
  Bottom Layer w0.254: v1(43.866,-34.788) 43.866,-35.423 44.17,-35.727 C16.2@47.93,-35.727
  Bottom Layer w0.5: v1(17.196,-31.486) 17.577,-31.105 30.169,-31.105 v1(30.381,-30.893) ; v1(39.421,-40.757) 40.818,-40.757 v1(43.231,-43.17) ; v1(46.66,-23.866) 46.66,-28.311 50.47,-32.121 v1(50.47,-35.357) ; v1(46.914,-43.17) 48.184,-44.44 51.486,-44.44 51.975,-43.951 v1(51.975,-43.593) ; C16.2@47.93,-35.727 48.107,-35.55 50.277,-35.55 v1(50.47,-35.357) ; C14.2@50.608,-43.17 51.975,-43.17 ; C17.2@55.169,-35.285 55.815,-35.285 v1(56.566,-34.534) 56.947,-34.153 56.947,-30.343 58.725,-28.565 58.725,-22.977 v1(57.201,-21.453) ; v1(72.695,-41.072) 72.888,-40.879 72.888,-37.958 v1(72.949,-37.897) 72.888,-37.836 72.888,-34.788 v1(72.822,-34.722) ; v1(75.743,-47.549) 75.362,-47.93 60.071,-47.93 60.122,-47.879 v1(60.122,-45.009) 59.487,-45.009 57.709,-43.231 53.512,-43.231 53.216,-43.527 52.041,-43.527 v1(51.975,-43.593) ; v1(50.47,-35.357) 50.47,-38.151 v1(51.613,-39.294) 51.613,-41.199 51.975,-41.561 v1(51.975,-43.593)
ACT-LED: R18.2 U1.63 | length 19.7
  Top Layer w0.254: U1.63@63.785,-33.621 65.541,-33.621 v1(66.853,-32.309)
  Top Layer w0.5: v1(79.807,-30.277) 82.082,-30.277 R18.2@82.093,-30.266
  Bottom Layer w0.5: v1(66.853,-32.309) 67.361,-31.801 78.283,-31.801 v1(79.807,-30.277)
AUX_12V: J5.1 R30.2 U36.1 | length 38.2
  Top Layer w0.5: v1(9.322,-73.65) 9.576,-73.904 R30.2@19.471,-73.904
  Top Layer w1: U36.1@10.894,-51.693 12.638,-51.693 14.021,-53.076 J5.1@14.021,-56.947
  Bottom Layer w0.5: v1(9.322,-73.65) 9.322,-58.664 11.039,-56.947 J5.1@14.021,-56.947
AUX_EN: R26.2 U1.117 U36.3 | length 42
  Top Layer w0.254: U36.3@10.894,-47.093 10.908,-47.107 v1(12.751,-47.107) 13.894,-47.107 14.021,-47.234 R26.2@14.021,-47.577 ; v1(39.352,-44.763) 39.352,-44.498 42.63,-41.221 U1.117@48.585,-41.221
  Bottom Layer w0.254: v1(12.751,-47.107) 13.894,-47.107 16.238,-44.763 v1(39.352,-44.763)
CAN0RX: U1.33 U35.4 | length 64.9
  Top Layer w0.254: U1.33@63.785,-45.621 65.24,-45.621 65.837,-46.218 v1(65.837,-49.266)
  Top Layer w0.5: v1(15.926,-31.105) U35.4@15.926,-29.29
  Bottom Layer w0.5: v1(15.926,-31.105) 15.926,-31.613 18.212,-33.899 21.641,-33.899 30.277,-42.535 40.056,-42.535 45.328,-47.807 55.996,-47.807 56.947,-48.758 65.329,-48.758 v1(65.837,-49.266)
CAN0TX: U1.34 U35.1 | length 64.9
  Top Layer w0.254: U1.34@63.808,-45.198 U1.34@63.785,-45.221 65.856,-45.221 66.599,-45.964 v1(66.599,-49.901)
  Top Layer w0.5: U35.1@19.736,-29.29 19.736,-30.851 21.514,-32.629 v1(21.514,-35.042)
  Bottom Layer w0.5: v1(21.514,-35.042) 29.896,-43.424 39.675,-43.424 44.708,-48.457 55.376,-48.457 56.327,-49.408 64.989,-49.408 65.547,-49.966 66.534,-49.966 v1(66.599,-49.901)
"CAN H": J1.4 J2.4 U35.7 | length 27.8
  Top Layer w0.5: J1.4@12.195,-40.945 15.23,-40.945 18.466,-37.709 U35.7@18.466,-34.19
  Bottom Layer w0.5: J2.4@12.195,-27.483 13.32,-27.483 14.275,-28.438 14.275,-38.865 J1.4@12.195,-40.945 J1.4@13.005,-40.945
"CAN L": J1.5 J2.5 U35.6 | length 23.4
  Top Layer w0.5: J1.5@12.195,-37.945 14.323,-37.945 ; J2.5@12.195,-24.483 13.368,-24.483 14.323,-25.438 14.323,-37.945 ; U35.6@17.196,-34.19 17.196,-37.201 16.452,-37.945 14.323,-37.945
CAN-12V: C6.+ C8.1 C9.2 J1.1 J2.1 R1.2 R3.2 R9.1 U8.4 U11.4 U32.1 U34.3 U36.4 | length 123.7
  Top Layer w0.5: R3.2@15.124,-14.351 17.206,-14.351
  Top Layer w2: U36.4@4.194,-49.393 4.194,-40.993 ; J2.1@9.195,-27.483 2.972,-27.483 1.829,-28.626 1.829,-40.056 2.718,-40.945 J1.1@9.195,-40.945 9.195,-43.805 16.434,-43.805 ; 17.831,-14.976 17.831,-20.945 23.8,-26.914 23.8,-42.407 22.402,-43.805 16.434,-43.805 ; 23.876,-34.712 U34.3@26.594,-34.712 ; U11.4@29.055,-69.205 U8.4@29.055,-61.585 29.055,-50.076 27.991,-49.012 C6.+@26.593,-49.012 19.609,-49.012 16.434,-45.837 16.434,-43.805
CAN_SHIELD: J1.3 J2.3 | length 25.2
  Bottom Layer w2: J1.3@9.195,-34.945 4.907,-34.945 2.145,-32.183 2.145,-22.788 3.45,-21.483 J2.3@9.195,-21.483
EARTH: J7.6 J7.7 J7.8 J7.9
  other v1: 43.993,-9.576 53.899,-9.576 43.993,-6.147 53.899,-6.147 43.993,-2.464 53.899,-2.337
EN0LED2: R34.2 U1.62 | length 29.3
  Top Layer w0.254: U1.62@63.785,-34.021 66.073,-34.021 v1(66.345,-33.749) v1@66.345,-33.833
  Top Layer w0.5: v1(83.871,-26.467) 85.649,-24.689 R34.2@87.924,-24.689
  Bottom Layer w0.5: v1(66.345,-33.749) 66.55,-33.749 67.609,-32.69 79.68,-32.69 82.22,-30.15 82.22,-28.118 v1(83.871,-26.467)
EP_LED_1: JP5.9 R17.1 | length 4
  Top Layer w0.5: R17.1@82.728,-44.363 83.51,-44.363 JP5.9@85.4,-42.473 JP5.9@85.006,-42.079
EP_LED_2: JP5.11 R18.1 | length 3.7
  Top Layer w0.5: R18.1@82.093,-32.066 82.866,-32.066 83.889,-31.043 JP5.11@85.4,-31.043
EP_RX_N: JP5.6 T1.9 | length 23.1
  Top Layer w0.5: T1.9@79.363,-42.342 v1(81.966,-42.342)
  Bottom Layer w0.5: v1(81.966,-42.342) 83.49,-40.818 83.49,-39.169 84.125,-38.534 86.92,-38.534 87.301,-38.153 87.301,-37.137 86.793,-36.629 84.506,-36.629 84.125,-36.248 84.125,-35.486 84.506,-35.105 87.682,-35.105 89.705,-37.128 JP5.6@90.22,-37.128
EP_RX_P: JP5.3 T1.11 | length 23.3
  Top Layer w0.5: T1.11@79.363,-39.802 82.093,-39.802 83.617,-38.278 86.664,-38.278 89.206,-40.82 91.746,-40.82 94.032,-38.534 v1(94.032,-34.977)
  Bottom Layer w0.5: JP5.3@92,-34.098 93.153,-34.098 v1(94.032,-34.977)
EP_TX_N: JP5.2 T1.14 | length 13.7
  Top Layer w0.5: T1.14@79.363,-35.992 82.601,-35.992 83.49,-35.103 84.252,-35.103 85.141,-35.992 85.903,-35.992 86.285,-35.61 86.285,-34.089 86.666,-33.708 87.936,-33.708 88.596,-33.048 JP5.2@90.22,-33.048
EP_TX_P: JP5.1 T1.16 | length 13.7
  Top Layer w0.5: T1.16@79.363,-33.452 83.109,-33.452 83.869,-32.692 86.793,-32.692 88.063,-31.422 91.364,-31.422 JP5.1@92,-32.058
EXT_12V: J3.1 R12.2 U11.1 | length 28.8
  Top Layer w0.5: v1(11.481,-77.46) 12.243,-78.222 R12.2@19.471,-78.222
  Top Layer w1: J3.1@14.021,-69.205 14.021,-67.427 14.543,-66.905 U11.1@22.355,-66.905
  Bottom Layer w0.5: v1(11.481,-77.46) 11.481,-70.221 12.497,-69.205 J3.1@14.021,-69.205
EXT_EN: R28.2 U1.119 U11.3 | length 57.4
  Top Layer w0.254: v1(21.895,-72.507) 22.355,-72.047 U11.3@22.355,-71.505 ; v1(23.165,-54.219) R28.2@23.165,-53.114 ; v1@37.892,-45.959 v1(38.024,-46.091) 38.082,-46.033 39.469,-46.033 40.804,-44.698 40.804,-44.189 42.964,-42.029 46.023,-42.029 ; 46.031,-42.025 46.027,-42.029 46.023,-42.029 ; U1.119@48.585,-42.021 46.031,-42.021 46.023,-42.029
  Bottom Layer w0.254: v1(21.895,-72.507) 22.426,-71.976 22.426,-54.219 ; v1(23.165,-54.219) 22.426,-54.219 ; v1(38.024,-46.091) 37.504,-45.571 24.765,-45.571 22.426,-47.909 22.426,-54.219
F\A\U\L\T\: D6.2 R4.1 U1.41 U10.4 | length 45
  Top Layer w0.254: U1.41@63.785,-42.421 66.104,-42.421 v1(66.472,-42.789)
  Top Layer w0.5: U10.4@48.575,-19.543 50.084,-19.543 50.597,-20.056 v1(50.851,-20.056) D6.2@51.867,-20.056 ; R4.1@59.106,-19.994 60.314,-19.994 v1(61.011,-20.691) 64.948,-24.628 v1(64.948,-31.359)
  Bottom Layer w0.5: v1(50.851,-20.056) 51.486,-19.421 59.741,-19.421 v1(61.011,-20.691) ; v1(64.948,-31.359) 64.948,-32.375 63.932,-33.391 63.932,-37.201 65.568,-38.837 65.518,-38.887 65.518,-42.343 65.964,-42.789 v1(66.472,-42.789)
F_CTS: JP7.5 U41.9 | length 14.3
  Top Layer w0.254: JP7.5@78.156,-18.532 78.156,-16.881 79.742,-15.295 U41.9@90.115,-15.295
F_R\S\T\: JP6.10 U40.5 | length 3.6
  Top Layer w0.254: JP6.10@41.58,-26.176 41.58,-27.532 41.912,-27.864 42.596,-27.864 43.116,-28.384 U40.5@43.116,-28.774
F_RTS: JP7.1 U41.12 | length 3.3
  Top Layer w0.254: JP7.1@88.316,-18.532 88.316,-17.262 88.783,-16.795 U41.12@90.115,-16.795
F_RX: JP7.3 U41.10 | length 9.1
  Top Layer w0.254: JP7.3@83.236,-18.532 83.236,-16.627 84.068,-15.795 U41.10@90.115,-15.795
F_TCK: JP6.4 U40.2 | length 2.9
  Top Layer w0.254: U40.2@44.616,-28.774 44.616,-27.876 45.39,-27.102 JP6.4@45.39,-26.176
F_TDI: JP6.8 U40.4 | length 2.9
  Top Layer w0.254: JP6.8@42.85,-26.176 42.85,-27.356 43.616,-28.122 U40.4@43.616,-28.774
F_TDO: JP6.6 U40.3 | length 2.6
  Top Layer w0.254: U40.3@44.116,-28.774 44.116,-26.18 JP6.6@44.12,-26.176
F_TMS: JP6.2 U40.1 | length 3.7
  Top Layer w0.254: U40.1@45.116,-28.774 45.116,-28.265 45.517,-27.864 46.279,-27.864 46.66,-27.483 JP6.2@46.66,-26.176
F_TX: JP7.2 U41.11 | length 6.2
  Top Layer w0.254: JP7.2@85.776,-18.532 85.776,-17.008 86.489,-16.295 U41.11@90.115,-16.295